# Altium PCB H18R2.PcbDoc (part 2 of 2)
Units mm, origin at the board's own origin, x right, y up, seen from the top; angles counter-clockwise.
Board outline 34.64 x 30 mm, 2 copper layers (Top Layer, Bottom Layer); 40 components, 30 nets, 120 pads, 38 vias.
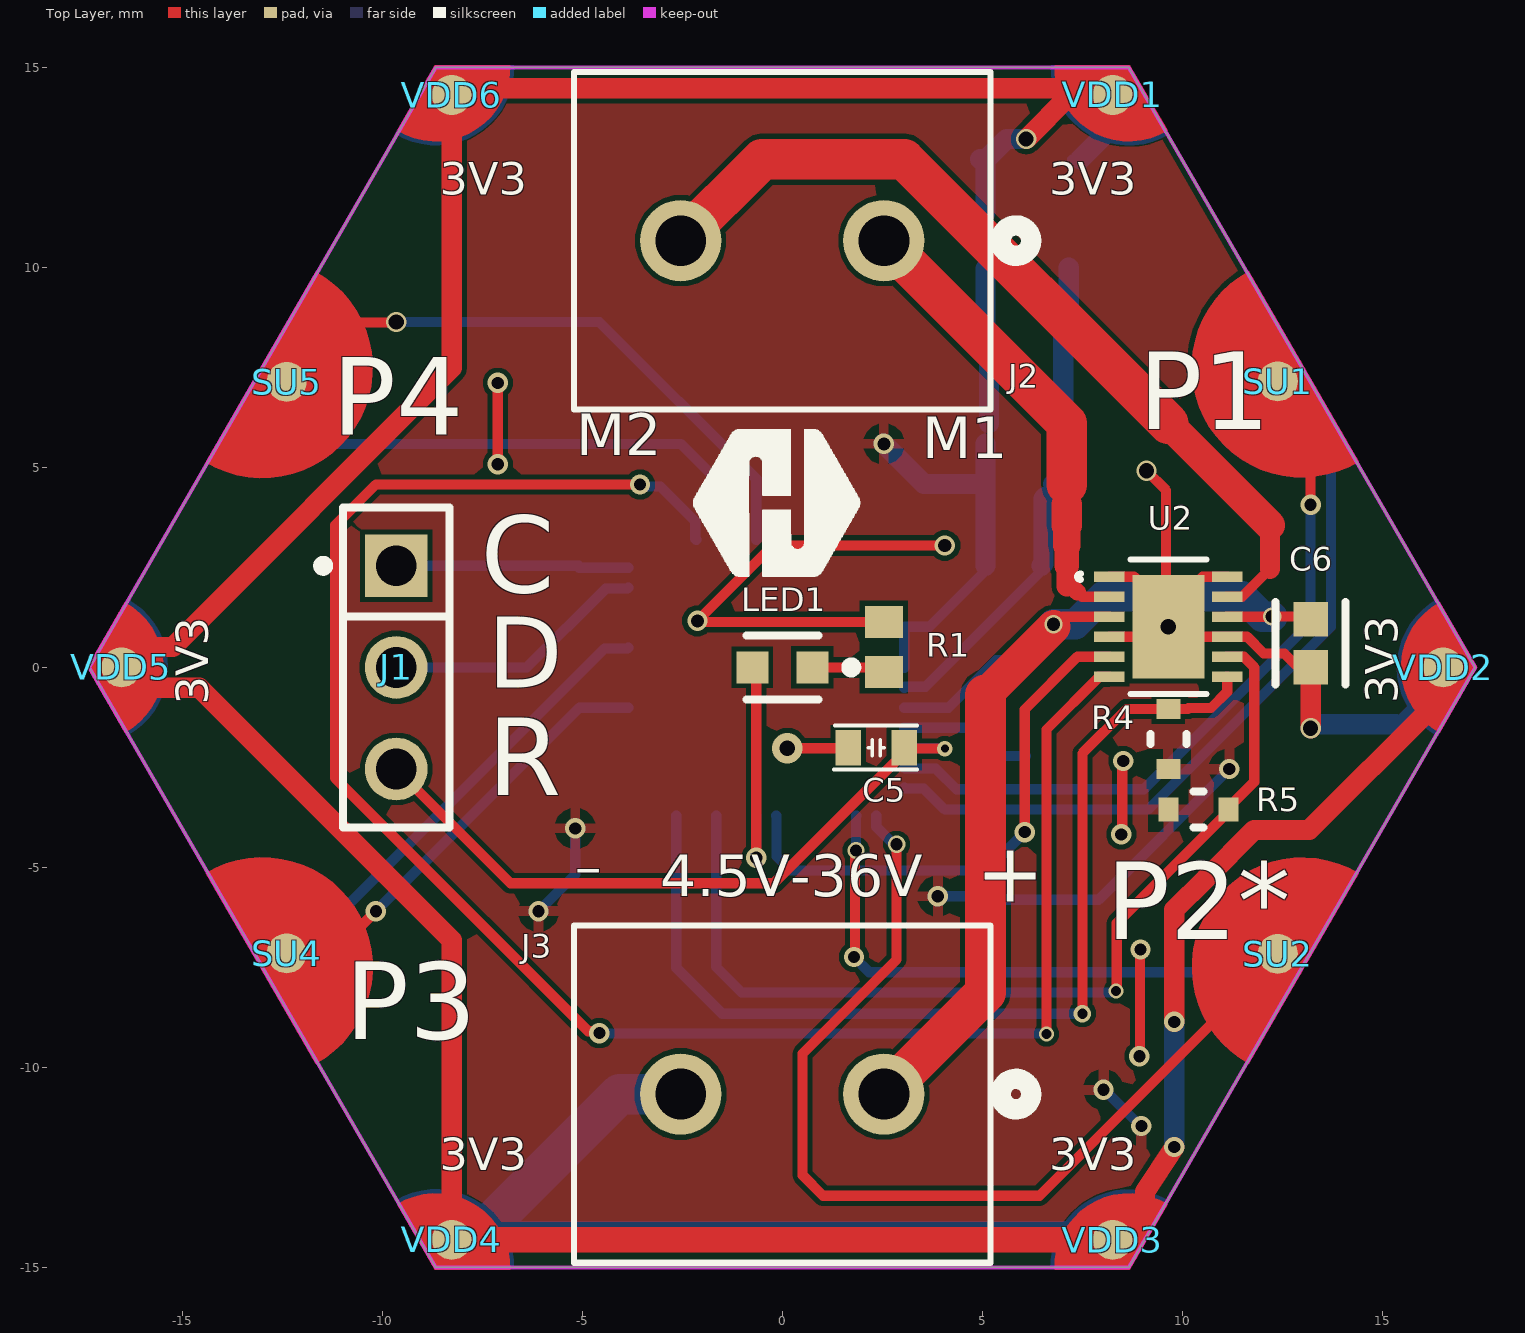
[diagram p0: Top Layer view]

## Via types
v1: diameter 0.508, hole 0.305, Top Layer to Bottom Layer, 21 vias
v2: diameter 0.508, hole 0.381, Top Layer to Bottom Layer, 5 vias
v3: diameter 0.508, hole 0.33, Top Layer to Bottom Layer, 3 vias
v4: diameter 0.457, hole 0.33, Top Layer to Bottom Layer, 2 vias
v5: diameter 0.432, hole 0.305, Top Layer to Bottom Layer, 2 vias
v6: diameter 0.381, hole 0.254, Top Layer to Bottom Layer, 2 vias
v7: diameter 0.762, hole 0.381, Top Layer to Bottom Layer, 1 vias
v8: diameter 0.432, hole 0.254, Top Layer to Bottom Layer, 1 vias
v9: diameter 0.381, hole 0.203, Top Layer to Bottom Layer, 1 vias

## Nets (pads, with @x,y where several pads share a name; then routed paths per layer and width w, separated by ;. In a path a pad name is that pad's centre, name@x,y a point inside that pad or via, vN(x,y) a via of type N, cw(c..) or ccw(c..) an arc to the next point about the centre after c; other vN are vias at no path point) (continued)
GND: (continued)
  Top Layer w0.254: v1(-7.112,5.08) v1(-7.112,7.112) ; v7(0.124,-2.021) 1.635,-2.021 C5.1 ; R1.1 -2.092,1.133 v3(-2.121,1.162) -0.235,3.048 v3(4.064,3.048) ; U2.4 9.402,0.766 v2(9.652,1.016) ; U2.1 8.796,2.266 U2.13@9.597,1.465 ; v1(8.475,-4.175) 8.5,-4.15 8.5,-2.337 v1@8.493,-2.33 ; v1(8.928,-9.724) 8.941,-9.71 8.941,-7.067 v1(8.954,-7.054) ; v2(9.106,4.915) 9.597,4.425 U2.13@9.597,1.465 ; U2.13@9.597,1.41 U2.13@9.597,1.465 ; U2.12 10.508,2.266 U2.13@9.652,1.41 ; C6.2@12.85,0.047 12.548,0.349 12.038,0.349 11.62,0.766 U2.9 9.902,0.766 v2(9.652,1.016) ; U2.13@9.597,1.465 U2.13@9.652,1.41 ; v2(9.652,1.016) U2.13@9.652,1.41
  Top Layer w0.508: v2(13.208,-1.524) 13.208,-0.002 C6.2@13.21,0
  Bottom Layer w0.254: -7.62,14.224 -7.112,14.224 ; 7.198,14.31 GND1.Pwr_D ; D1.1 D1.1@7.446,12.7 ; 8.128,13.382 8.128,13.716 ; 8.224,-13.622 8.324,-13.722 ; 15.445,-1.319 16.256,-0.508
  Bottom Layer w0.508: D1.1@7.446,12.7 8.128,13.382 ; v2(13.208,-1.524) 13.311,-1.421 15.343,-1.421
  Bottom Layer w0.762: -7.276,-14.224 7.456,-14.224
  Bottom Layer w1.016: -7.112,-13.716 -4.064,-10.668 J3.2
  other v1: 8.524,-2.338
M1: J2.1 U2.2 | length 11.2
  Top Layer w0.254: 7.378,1.884 7.496,1.766 U2.2
  Top Layer w0.432: 7.112,2.032 7.23,2.032 7.378,1.884
  Top Layer w0.508: 7.112,2.032 7.112,2.54
  Top Layer w0.61: 7.112,2.54 7.112,3.048
  Top Layer w0.686: 7.112,3.048 7.112,3.556
  Top Layer w0.762: 7.112,3.556 7.112,4.064
  Top Layer w1.016: J2.1 7.112,6.096 7.112,4.572
M2: J2.2 U2.11 | length 21.8
  Top Layer w0.254: U2.11 11.492,1.766 12.192,2.466
  Top Layer w0.508: 12.192,2.466 12.192,3.556
  Top Layer w0.762: 9.652,6.096 12.192,3.556
  Top Layer w1.016: J2.2 -0.508,12.7 3.048,12.7 9.652,6.096
NetLED1_1: LED1.1 R1.2 | length 1.3
  Top Layer w0.254: LED1.1 2.032,0
NetLED1_2: LED1.2 U1.19 | length 5.9
  Top Layer w0.254: LED1.2 -0.65,-0.1 v1(-0.65,-4.758)
  Bottom Layer w0.254: v1(-0.65,-4.758) U1.19@-0.651,-3.709
NetR4_1: R4.1 U1.23 U2.7 | length 25.6
  Top Layer w0.254: v8(7.503,-8.658) 7.503,-2.149 8.612,-1.04 R4.1 10.136,-1.04 10.16,-1.016 10.718,-1.016 11.125,-0.609 U2.7
  Bottom Layer w0.254: U1.23 -2.652,-7.508 -1.502,-8.658 v8(7.503,-8.658)
NetR5_1: R5.1 U1.21 U2.8 | length 24.4
  Top Layer w0.254: v6(8.343,-8.092) 8.363,-8.071 8.363,-6.395 11.152,-3.606 R5.1 11.152,-3.506 11.801,-2.857 11.801,0 11.535,0.266 U2.8
  Bottom Layer w0.254: U1.21 -1.652,-7.492 -1.016,-8.128 8.307,-8.128 v6(8.343,-8.092)
NetU1_8: U1.8 X1.P$3 | length 3.5
  Bottom Layer w0.254: U1.8 4.154,-1.008 5.346,0.184 X1.P$3
NetU1_9: U1.9 X1.P$1 | length 3.3
  Bottom Layer w0.254: U1.9 4.638,-1.508 5.346,-2.216 X1.P$1
NetU1_18: U1.18 U2.5 | length 13.5
  Top Layer w0.254: v1(6.06,-4.118) 6.06,-1.052 7.378,0.266 U2.5
  Bottom Layer w0.254: U1.18 -0.142,-3.718 -0.142,-4.728 0.21,-5.08 5.099,-5.08 v1(6.06,-4.118)
NetU1_39: U1.39 U2.6 | length 46.8
  Top Layer w0.254: v1(-4.572,-9.144) -4.621,-9.095 -4.85,-9.095 -11.176,-2.769 -11.176,3.556 -10.16,4.572 v1(-3.556,4.572) ; v6(6.604,-9.166) 6.604,-1.555 7.925,-0.234 U2.6
  Bottom Layer w0.254: v1(-4.572,-9.144) -4.561,-9.155 6.593,-9.155 v6(6.604,-9.166) ; v1(-3.556,4.572) -3.507,4.523 -3.049,4.523 -2.175,3.649 -2.175,3.215 U1.39
NRST: C5.2 J1.3 U1.10 | length 17.4
  Top Layer w0.254: J1.3 -6.796,-5.396 -0.215,-5.396 3.048,-2.133 C5.2 3.072,-2.032 v9(4.064,-2.032)
  Bottom Layer w0.254: U1.10 3.06,-2.02 4.052,-2.02 v9(4.064,-2.032)
UART1_RX: SD4.UART_D U1.32 | length 10.1
  Bottom Layer w0.254: -11.176,-6.096 -11.012,-6.096 -4.447,0.469 -3.875,0.469 U1.32
UART1_TX: SU4.UART_U U1.29 | length 9.7
  Top Layer w0.254: -10.732,-7.112 -10.732,-6.668 v1(-10.16,-6.096)
  Bottom Layer w0.254: v1(-10.16,-6.096) -5.072,-1.008 U1.29
UART2_RX: SD2.UART_D U1.14 | length 14.5
  Top Layer w0.254: v1(1.793,-7.24) 1.818,-7.215 1.818,-4.603 v5(1.843,-4.578)
  Bottom Layer w0.254: v1(1.793,-7.24) 2.172,-7.62 11.868,-7.62 12.328,-7.16 SD2.UART_D ; v5(1.843,-4.578) 1.845,-4.575 1.845,-3.711 U1.14
UART2_TX: SU2.UART_U U1.13 | length 23.2
  Top Layer w0.254: v5(2.859,-4.421) 2.859,-7.301 0.508,-9.652 0.508,-12.7 1.016,-13.208 6.431,-13.208 11.282,-8.357
  Bottom Layer w0.254: U1.13 2.348,-3.983 2.752,-4.387 2.825,-4.387 v5(2.859,-4.421)
UART3_RX: U1.48
UART3_TX: U1.47
UART4_RX: SD1.UART_D U1.12 | length 17.2
  Bottom Layer w0.254: U1.12 3.071,-3.031 3.539,-3.031 4.064,-3.556 9.144,-3.556 13.716,1.016 13.716,5.462
UART4_TX: SU1.UART_U U1.11 | length 17.2
  Top Layer w0.254: 12.397,5.891 13.208,5.08 v1(13.208,4.064)
  Bottom Layer w0.254: U1.11 3.071,-2.531 3.838,-2.531 4.355,-3.048 9.036,-3.048 13.208,1.124 v1(13.208,4.064)
UART5_RX: SD5.UART_D U1.41 | length 11.7
  Bottom Layer w0.254: -11.281,5.588 -2.54,5.588 -1.152,4.2 U1.41
UART5_TX: SU5.UART_U U1.42 | length 13.8
  Top Layer w0.254: -11.134,8.17 -10.684,8.62 -9.668,8.62 v2(-9.652,8.636)
  Bottom Layer w0.254: v2(-9.652,8.636) -4.572,8.636 -0.652,4.716 U1.42
UART6_RX: U1.16
UART6_TX: U1.15
VDD: D1.2 FB1.1 VDD1.Pwr_U VDD2.Pwr_U VDD3.Pwr_U VDD4.Pwr_U VDD5.Pwr_U VDD6.Pwr_U | length 89.3
  Top Layer w0.254: 7.5,14.31 VDD1.Pwr_U ; 8.975,-13.847 9.068,-13.645 9.068,-13.431 ; 16.256,-0.474 16.256,-0.466 16.52,-0.202 VDD2.Pwr_U
  Top Layer w0.508: -16.256,-0.508 -14.575,-0.508 -8.26,-6.823 VDD4.Pwr_U ; -15.717,0.508 -15.24,0.508 -8.26,7.488 VDD6.Pwr_U ; -7.232,14.476 7.198,14.476 7.5,14.476 ; v2(6.096,13.208) 7.198,14.31 ; 9.068,-13.431 9.068,-13.224 9.068,-13.11 v1(9.801,-11.992) ; v1(9.799,-8.862) 9.801,-8.86 9.801,-6.061 10.594,-5.268 11.798,-4.064 13.173,-4.064 16.256,-0.981 16.256,-0.474
  Top Layer w0.635: VDD4.Pwr_U VDD3.Pwr_U
  Bottom Layer w0.254: v1(9.801,-11.992) v1@9.808,-11.985
  Bottom Layer w0.508: FB1.1 5.08,12.684 5.064,12.7 D1.2 5.096,12.7 5.604,13.208 v2(6.096,13.208) ; v1(9.799,-8.862) 9.799,-11.977 9.801,-11.979 v1(9.801,-11.992)
VDDA: C1.2 C2.1 C3.2 C4.2 FB1.2 R4.2 R5.2 U1.4 U1.5 U1.6 | length 26.3
  Bottom Layer w0.254: v1(-6.096,-6.096) -5.177,-5.177 v1(-5.177,-4.024) ; U1.6 U1.5 U1.4 3.071,1.015 3.68,1.015 5.08,2.415 C1.2 ; v1(3.887,-5.72) 5.045,-5.72 5.132,-5.808 7.908,-5.808 v1(11.176,-2.54) ; C3.2@4.987,4.586 5.18,4.393 C3.2 ; C4.2@5.08,8.583 C4.2 ; v1(8.03,-10.558) 8.051,-10.558 8.956,-11.463 v1(8.977,-11.463)
  Bottom Layer w0.508: v3(2.54,5.588) 3.542,4.586 C3.2@4.987,4.586 ; C1.2 5.08,3.26 ; 5.08,3.261 5.08,4.268 5.08,4.586 C2.1@5.08,5.588 ; C4.2@5.08,8.583 FB1.2 ; C2.1 C4.2@5.169,8.223
VM: C6.1 J3.1 U2.3 U2.10 | length 23
  Top Layer w0.254: v4(6.782,1.078) 6.837,1.078 7.025,1.266 U2.3 ; U2.10 12.245,1.266 v4(12.25,1.271) 13.142,1.271 C6.1
  Top Layer w0.838: 5.08,-0.69 v4@6.782,1.012
  Top Layer w1.016: J3.1 5.08,-8.128 5.08,-0.69
  Bottom Layer w0.762: v4(6.782,1.078) 7.328,1.078 8.028,1.778 11.494,1.778 12.002,1.271 v4(12.25,1.271)
VSSA: C1.1 C2.2 C3.1 C4.1 R3.2 U1.7 | length 12.4
  Bottom Layer w0.254: U1.7 3.071,-0.485 3.579,-0.485 5.08,1.016 ; 5.081,1.016 6.48,2.415 C1.1 ; C3.1 6.58,4.393 C3.1@6.773,4.586 ; C3.1@6.874,4.586 7.023,4.735 ; R3.2 R3.2@7.158,9.997
  Bottom Layer w0.508: C1.1 6.529,2.589 6.529,4.217 C3.1 ; C3.1@6.773,4.586 C3.1@6.874,4.586 ; 7.023,4.735 C2.2 C4.1@7.023,8.223 ; C4.1 R3.2@7.158,9.997
pads on no net: U1.1 U1.2 U1.3 U1.17 U1.20 U1.22 U1.24 U1.25 U1.26 U1.27 U1.28 U1.30 U1.31 U1.33 U1.34 U1.37 U1.38 U1.40 U1.43 U1.44 U1.45 U1.46

## Polygon pours and split planes (outlines as drawn)
VDDA on Top Layer "VDDA_L01_P000" (solid, remove dead copper, pour order 0): -8.66,-15 8.66,-15 17.32,0 8.66,15 -8.66,15 -17.32,0
GND on Bottom Layer "GND_L02_P001" (solid, remove dead copper, pour order 1): -8.66,-15 8.66,-15 17.32,0 8.66,15 -8.66,15 -17.32,0

## Keep-outs
Keep-Out Layer:
  the board outline again, w0.1

## Silkscreen, mask and mechanical layers (free items; w line width, h text height)
Top Overlay:
  drawing of 1337 lines, arcs and shapes, not listed
  text "3V3" at -8.56,11.811 h0.81
  text "3V3" at 6.68,11.811 h0.81
  text "P1" at 8.909,5.954 h1.93
  text "P4" at -11.247,5.81 h1.93
  text "M2" at -5.148,4.956 h1.78
  text "M1" at 3.504,4.882 h1.78
  text "C" at -7.537,1.864 h1.93
  text "D" at -7.366,-0.508 h1.78
  text "3V3" at 15.385,-0.901 h0.81 r90
  text "3V3" at -14.351,-0.94 h0.81 r90
  text "R" at -7.366,-3.2 h1.93
  text "-" at -5.212,-6.083 h2.54
  text "4.5V-36V" at -3.048,-6.076 h1.78
  text "+" at 4.844,-6.346 h2.54
  text "P2*" at 8.105,-6.801 h1.93
  text "P3" at -10.922,-9.296 h1.93
  text "3V3" at -8.56,-12.573 h0.81
  text "3V3" at 6.68,-12.573 h0.81
Bottom Overlay:
  text "GND" at -4.817,13.769 h0.81
  text "GND" at 7.184,13.756 h0.81
  text "P4" at -8.239,6.11 h1.93
  text "P1" at 11.248,5.723 h1.93
  text "GND" at -14.351,1.448 h0.81 r90
  text "GND" at 15.113,0.94 h0.81 r90
  text "P3" at -11.023,-5.67 h1.93
  text "P2*" at 13.462,-5.74 h1.93
  text "GND" at 8.56,-13.081 h0.81
  text "GND" at -6.65,-13.1 h0.81
  text "H01R00" at 4.318,-13.97 h1.78
Top Solder:
  drawing of 18 lines, arcs and shapes, not listed
Dimensions:
  the board outline again, w0.1

## Text inside footprints (layer, text, board x,y; h text height)
C2: Mechanical 32 "2" at 6.769,6.096 h0.64 r180; Mechanical 32 "1" at 4.915,6.096 h0.64 r180; Mechanical 33 "C40" at 7.963,6.278 h0.64 r180
C4: Mechanical 32 "2" at 5.558,8.359 h0.64; Mechanical 32 "1" at 7.412,8.359 h0.64; Mechanical 33 "C40" at 4.364,8.177 h0.64
U2: Mechanical 13 "RefDes2" at 7.429,0.381 h1.27